# EAGLE board IambicKey (EAGLE 6.5.0)
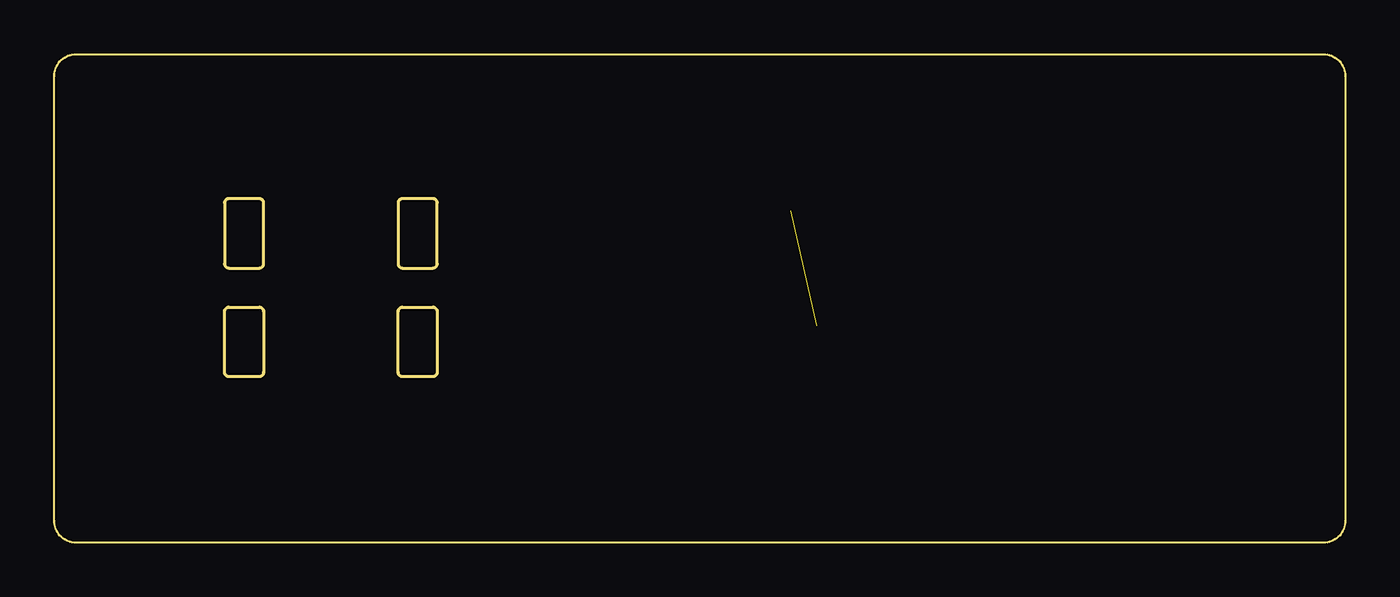
[diagram p0: board, top side]
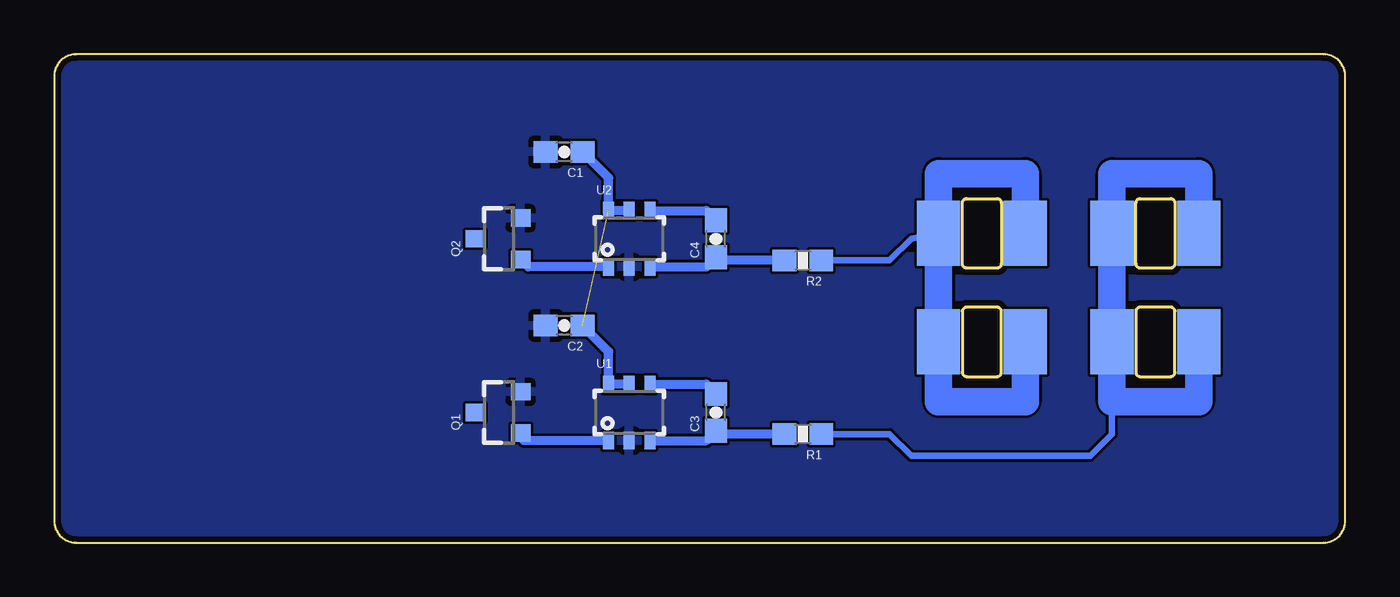
[diagram p1: board, bottom side, seen from below]

Size 59.5 x 22.5 mm. Coordinates in mm from the lower left corner, seen from the top.
Outline: 58.5,0 1,0 arc-90 0,1 0,21.5 arc-90 1,22.5 58.5,22.5 arc-90 59.5,21.5 59.5,1 arc-90 58.5,0
Copper layers (1*16): Top 0.035mm / dielectric 1.5mm / Bottom 0.035mm
Design rules "dirt_cheap_dirty_boards.v1": minimum track width 5mil, minimum drill 12mil, track to track 5mil, track to pad 5mil, pad to pad 5mil, via to via 5mil, smd to smd 0mil, copper to edge 10mil, drill to drill 10mil, minimum pad ring 10mil, minimum via ring 6mil, stop-mask expansion 2mil, vias tented up to drill 25mil, thermal gap 10mil

## Footprints (pad centres in the part's own frame; a part is rotated, then mirrored left to right if it is on the bottom)
0603-CAP = smd 1.1 x 1: 1 -0.85,0; 2 0.85,0
SOT23-3 = smd 0.8 x 0.9: 1 -0.95,-1; 2 0.95,-1; 3 0,1.1
0603-RES = smd 1.1 x 1: 1 -0.85,0; 2 0.85,0
SOT-23-6 = smd 0.51 x 0.8: 1 -0.95,-1.3; 2 0,-1.3; 3 0.95,-1.3; 4 0.95,1.3; 5 0,1.3; 6 -0.95,1.3
PADDLE = smd 2 x 3 bottom: P$1 2,2.5; P$2 -2,2.5; P$3 -2,-2.5; P$4 2,-2.5

## Placement (x,y rotation side)
C1  100n  [0603-CAP]  36,18 180 bottom
C2  100n  [0603-CAP]  36,10 180 bottom
C3  2n2  [0603-CAP]  29,6 90 bottom
C4  2n2  [0603-CAP]  29,14 90 bottom
Q1  MOSFET-NCHANNELSMD  [SOT23-3]  39,6 90 bottom
Q2  MOSFET-NCHANNELSMD  [SOT23-3]  39,14 90 bottom
R1  22K  [0603-RES]  25,5 180 bottom
R2  22K  [0603-RES]  25,13 180 bottom
U1  AT42QT1012  [SOT-23-6]  33,6 0 bottom
U2  AT42QT1012  [SOT-23-6]  33,14 0 bottom
U$1  PADDLE  [PADDLE]  8.75,11.75 0 top
U$2  PADDLE  [PADDLE]  16.75,11.75 0 top

## Library data of the parts
C1-C4 Q1 Q2 R1 R2 U1 U2 = SparkFun
U$1 U$2 = morseSounder

## Nets
GND: C1.2 C2.2 Q1.2 Q2.2 U1.2 U2.2
N$1: Q1.1 U1.1
N$2: Q2.1 U2.1
N$3: C3.2 U1.4
N$4: C3.1 R1.2 U1.3
N$5: R1.1 U$1.P$1 U$1.P$2 U$1.P$3 U$1.P$4
N$6: C4.2 U2.4
N$7: C4.1 R2.2 U2.3
N$8: R2.1 U$2.P$1 U$2.P$2 U$2.P$3 U$2.P$4
VCC: C1.1 C2.1 U1.5 U1.6 U2.5 U2.6

## Tracks (layer width: path | path; a pad name or v marks a point on that pad's centre or on a via)
GND
  pour Bottom: -1,24 61,24 61,-1 -1,-1
N$1
  Bottom 0.406: U1.1 37.85,4.7 Q1.1
N$2
  Bottom 0.406: U2.1 37.65,12.7 Q2.1
N$3
  Bottom 0.406: U1.4 29.45,7.3 C3.2
N$4
  Bottom 0.406: U1.3 29.45,4.7 C3.1 28.85,5 R1.2
N$5
  Bottom 0.305: R1.1 21,5 20,4 11.75,4 10.75,5 10.75,6.5
  Bottom 1.27: U$1.P$2 6.75,17 10.75,17 U$1.P$1 U$1.P$4 10.75,6.5 6.75,6.5 U$1.P$3
N$6
  Bottom 0.406: U2.4 29.45,15.3 C4.2
N$7
  Bottom 0.406: R2.2 28.85,13 C4.1 29.45,12.7 U2.3
N$8
  Bottom 0.305: R2.1 21,13 20,14 U$2.P$1
  Bottom 1.27: U$2.P$3 14.75,6.5 18.75,6.5 U$2.P$4 U$2.P$1 18.75,17 14.75,17 U$2.P$2
VCC  (1 unrouted)
  Bottom 0.406: U2.5 U2.6 33.95,16.8 C1.1 | U1.5 U1.6 33.95,8.8 C2.1